# Altium PCB ARM_PCB.PcbDoc
Units mm, origin at the board's own origin, x right, y up, seen from the top; angles counter-clockwise.
Board outline 82.85 x 47.25 mm, 2 copper layers (Top Layer, Bottom Layer); 52 components, 38 nets, 234 pads, 30 vias.
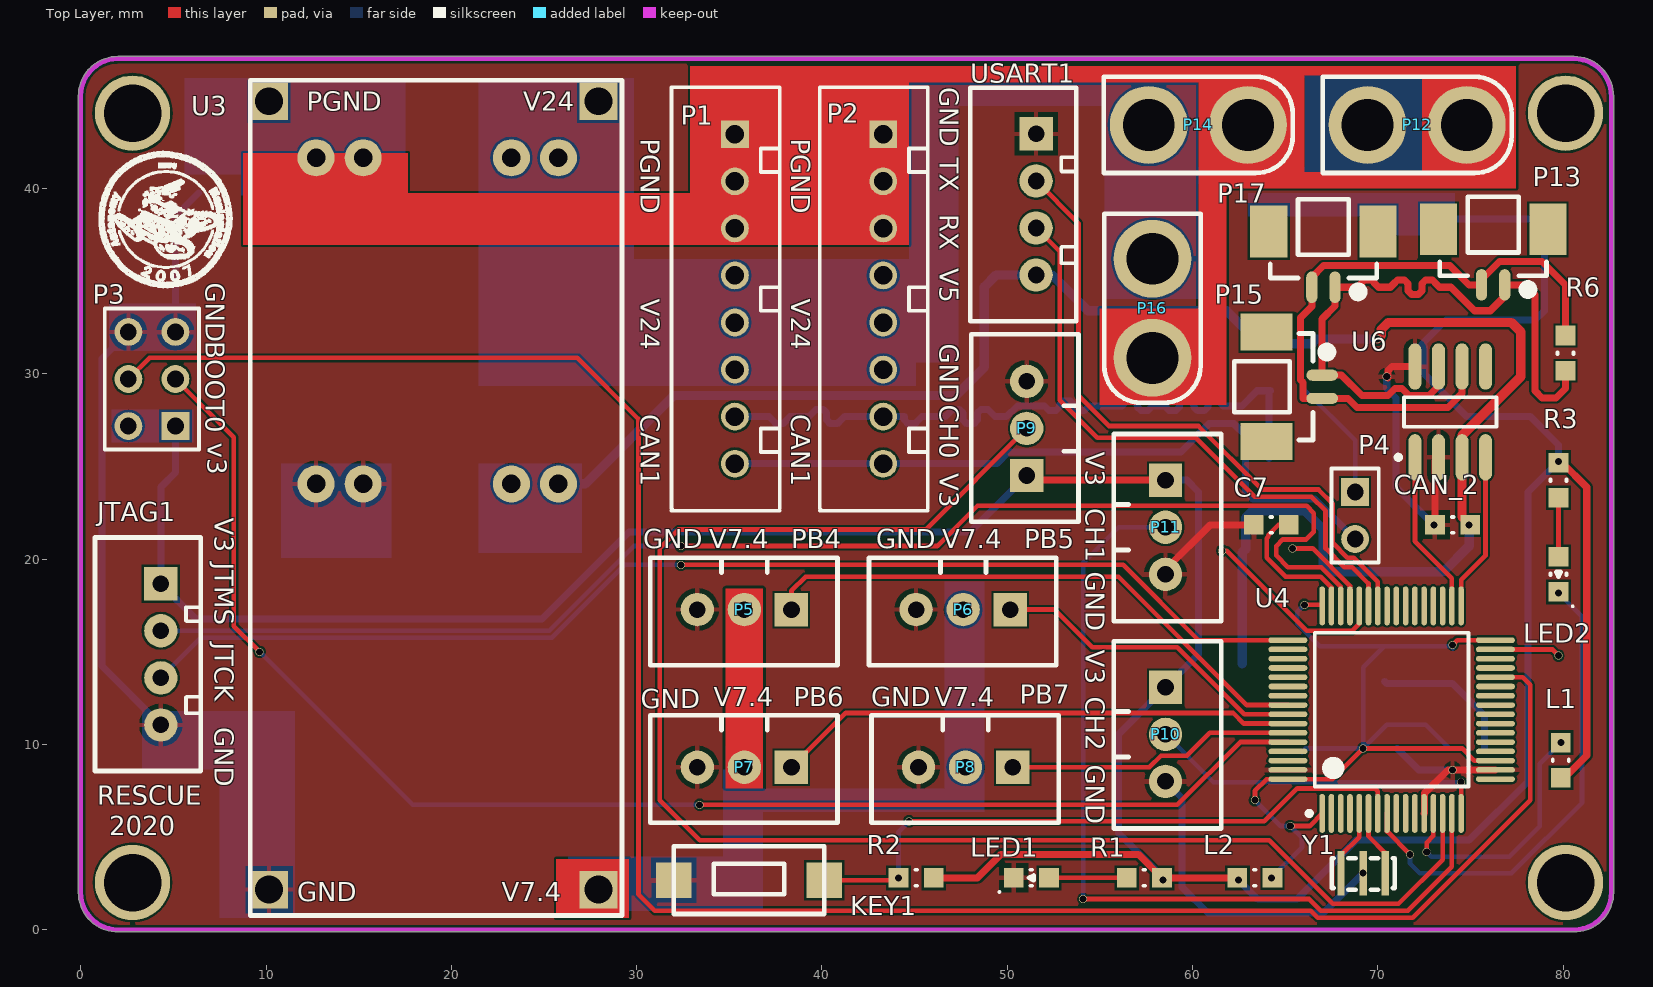
[diagram p0: Top Layer view]
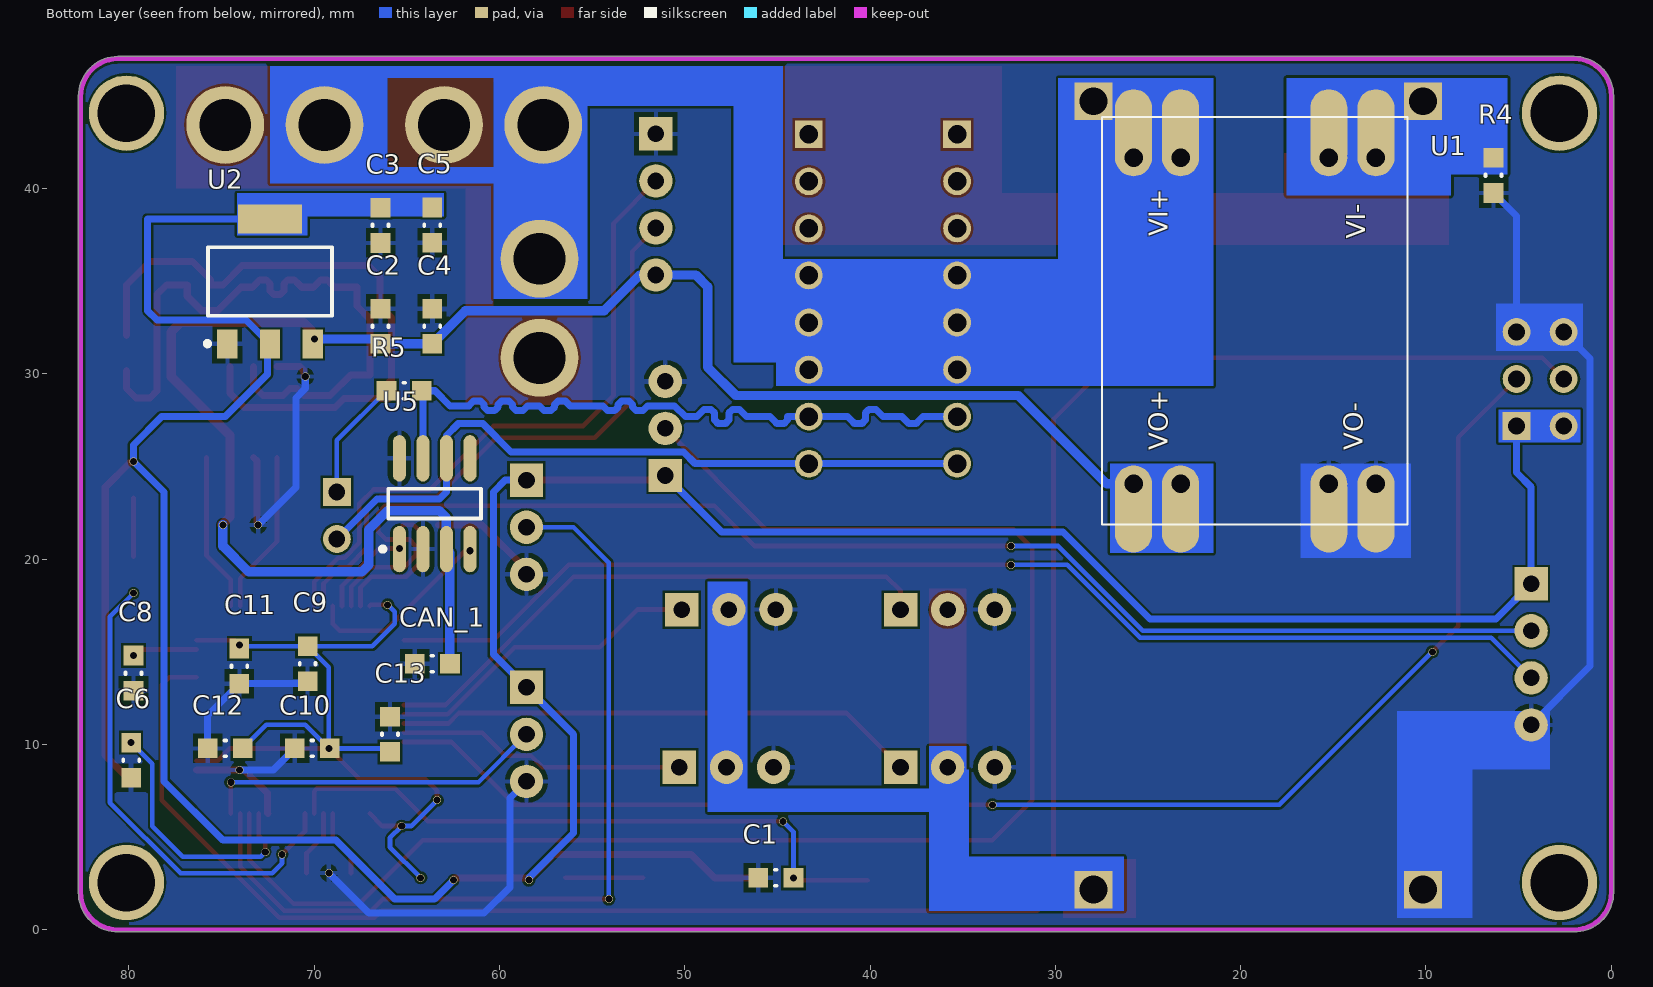
[diagram p1: Bottom Layer view, seen from below]
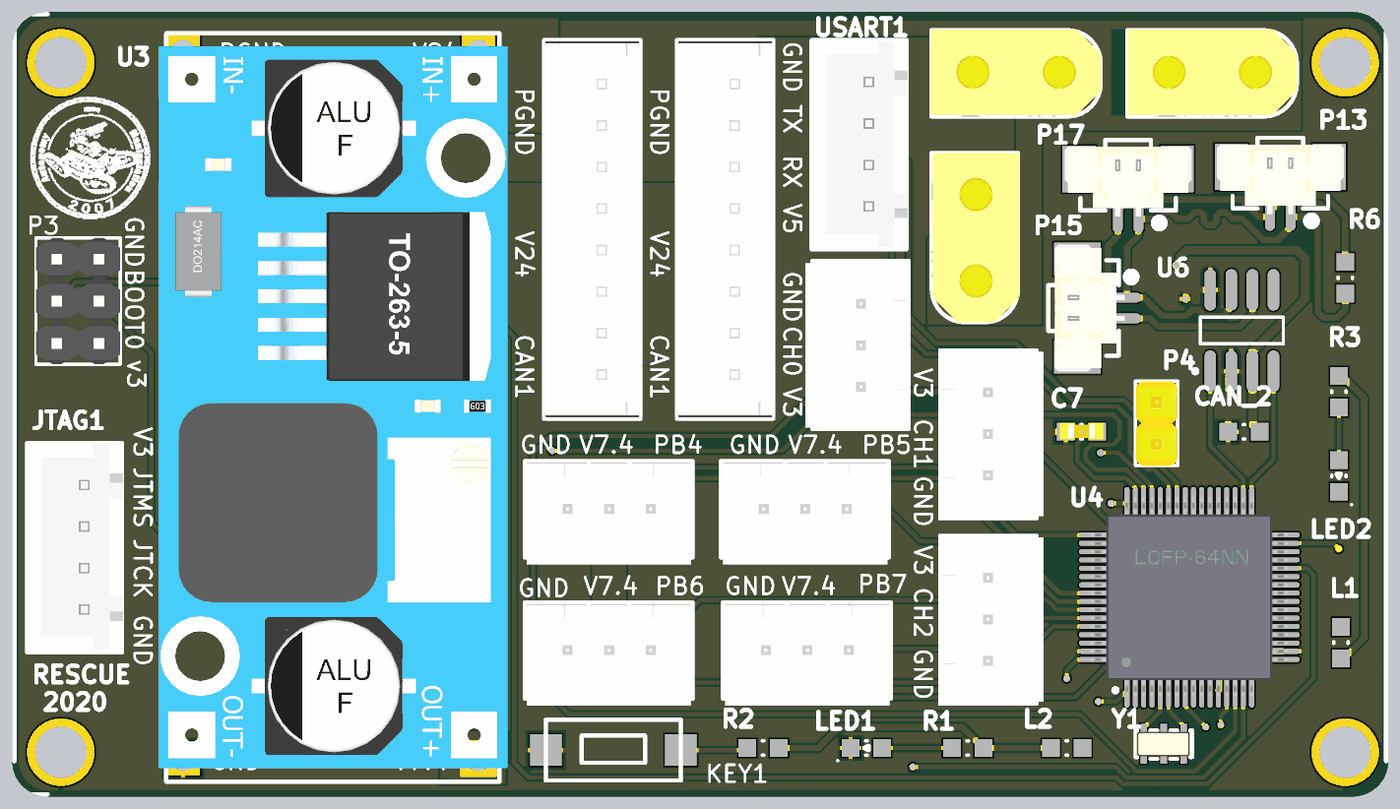
[diagram p2: 3D render of the assembled board from above, using the file's embedded part models]

## Layer stack, top to bottom
Top Solder: solder mask 0.0102, Solder Resist, Dk 3.5
Top Layer: signal copper 0.0356
Dielectric 1: dielectric 0.32, FR-4, Dk 4.8
Bottom Layer: signal copper 0.0356
Bottom Solder: solder mask 0.0102, Solder Resist, Dk 3.5

## Board outline
2,-0.127 cw(c2,2) -0.127,2 -0.127,45 cw(c2,45) 2,47.127 80.6,47.127 cw(c80.6,47) 80.601,47.127 cw(c80.579,44.979) 82.727,44.979 cw(c80.579,44.979) 82.727,44.957 82.727,2 cw(c80.6,2) 80.6,-0.127

## Design rules (kind name [scope] priority, off if disabled: settings)
Clearance [All] p1: gap=0.127 ignorepadtopadclearanceinfootprint=TRUE
ComponentClearance [All] p1 off: gap=0.254 collisioncheckmode=3 verticalgap=0.254 showdistances=FALSE
DiffPairsRouting [All] p1: maxlimit=0.254 minlimit=0.254 mostfreqgap=0.254 toplayer_minwidth=0.381 toplayer_maxwidth=0.381 toplayer_prefwidth=0.381 bottomlayer_minwidth=0.381 bottomlayer_maxwidth=0.381 bottomlayer_prefwidth=0.381 maxuncoupledlength=12.7
Height [All] p1 off: minheight=0 maxheight=25.4 prefheight=12.7
HoleSize [All] p1 off: absolutevalues=TRUE maxlimit=2.54 minlimit=0.025 maxpercent=80.000 minpercent=20.000
MinimumSolderMaskSliver [All] p1 off: minsoldermaskwidth=0.254
PolygonConnect [All] p1: connectstyle=Relief reliefconductorwidth=0.254 reliefentries=4 polygonreliefangle="90 Angle" airgapwidth=0.254
RoutingVias [All] p1: holewidth=0.711 width=1.27 viastyle="Through Hole" minholewidth=0.711 minwidth=1.27 maxholewidth=0.711 maxwidth=1.27
SilkToSilkClearance [All] p1 off: silktosilkclearance=0.254
SilkToSolderMaskClearance [IsPad] p1 off: minsilkscreentomaskgap=0.254 clearancetoexposedcopper=TRUE
SolderMaskExpansion [All] p1: expansion=0.102
Width VCC_5 [InNet('VCC_5')] p1: maxlimit=0.762 minlimit=0.381 preferedwidth=0.762
Width PGND [InNet('PGND')] p2: maxlimit=1.27 minlimit=0.762 preferedwidth=1.27
Width GND [InNet('GND')] p3: maxlimit=0.762 minlimit=0.254 preferedwidth=0.762
Width VCC_24 [InNet('VCC_24')] p4: maxlimit=1.27 minlimit=0.889 preferedwidth=1.27
Width VCC_7.4 [InNet('VCC_7.4')] p5: maxlimit=0.762 minlimit=0.508 preferedwidth=0.762
Width VCC_3.3 [InNet('VCC_3.3')] p6: maxlimit=0.381 minlimit=0.381 preferedwidth=0.381
Width [All] p7: maxlimit=0.254 minlimit=0.254 preferedwidth=0.254
23 further rules are at their usual default settings.

## Classes and differential pairs
differential pair CAN2: +CAN2_P -CAN2_N
differential pair CAN1: +CAN1_P -CAN1_N

## Components (designator, comment, footprint, x,y, rotation, side; value= is the part's Value field where it differs from the comment)
C1 "104" C0603 45.085,2.794 r0 bottom
C2 "104" C0603 66.421,32.564 r90 bottom
C3 "104" C0603 66.421,38.011 r270 bottom
C4 "104" C0603 63.627,32.564 r270 bottom
C5 "104" C0603 63.627,38.025 r90 bottom
C6 "104" C0603/1608 79.883,9.144 r270 bottom
C7 "225" C0603/1608 64.255,21.844 r0 top
C8 "225" C0603/1608 79.756,13.843 r90 bottom
C9 "104" C0603/1608 70.358,14.351 r90 bottom
C10 "104" C0603/1608 70.104,9.779 r180 bottom
C11 "104" C0603/1608 74.041,14.224 r90 bottom
C12 "104" C0603/1608 74.803,9.779 r180 bottom
C13 "104" C0603/1608 65.913,10.541 r270 bottom
CAN_1 "104" C0603 63.627,14.351 r180 bottom
CAN_2 "104" C0603 74.041,21.844 r0 top
JTAG1 "Header 4" Header1*4_XH2.54_zhi 3.302,5.715 r90 top
KEY1 "KEY2" KEY_RESET 35.941,2.794 r0 top
L1 "UPZ1608E101" L0603/1608 79.883,9.144 r90 top
L2 "UPZ1608E101" L0603/1608 63.373,2.794 r0 top
LED1 "LED BLUE" LED0603 51.308,2.794 r180 top
LED2 "LED RED" LED0603 79.756,19.177 r270 top
P1 "Header 8" Header1*8_XH2.54_zhi 38.1,39.624 r0 top
P2 "Header 8" Header1*8_XH2.54_zhi 46.101,39.624 r0 top
P3 "Header 3X2" BOOT 8.917,24.511 r180 top
P4 "Header 2" TM 68.906,22.86 r0 top
P5 "Header 3H" Header1*3XH2.54 35.306,13.208 r180 top
P6 "Header 3H" Header1*3XH2.54 47.117,13.208 r180 top
P7 "Header 3H" Header1*3XH2.54 35.306,4.699 r180 top
P8 "Header 3H" Header1*3XH2.54 47.244,4.699 r180 top
P9 "Header 3H" Header1*3XH2.54 46.99,27.559 r90 top
P10 "Header 3H" Header1*3XH2.54 62.611,10.033 r270 top
P11 "Header 3H" Header1*3XH2.54 62.611,21.209 r270 top
P12 "Header 2" XT30_ĸ 73.898,51.435 r0 top
P13 "CAN-GH1.25-2P" GH1.25-2P（立式） 76.854,34.798 r0 top
P14 "Header 2" XT30_ĸ 62.087,51.435 r0 top
P15 "CAN-GH1.25-2P" GH1.25-2P（立式） 67.002,29.923 r90 top
P16 "Header 2" XT30_ĸ 65.84,31.766 r270 top
P17 "CAN-GH1.25-2P" GH1.25-2P（立式） 67.691,34.671 r0 top
R1 "4.7K" R0603 57.404,2.794 r180 top
R2 "10kΩ" R0603 45.085,2.794 r0 top
R3 "4K7" R0603 79.756,24.257 r90 top
R4 "0R" R0603 6.35,40.706 r270 bottom
R5 "R_120" R0603 65.151,29.083 r0 bottom
R6 "R_120" R0603 80.137,31.115 r90 top
U1 "降压DM02" 降压DM02 17.081,47.08 r270 bottom
U2 "1117_WYN" SOT-223 72.39,34.977 r180 bottom
U3 "LM2596" LM2596_big 19.86,24.725 r180 top
U4 "STM32F405RGT6" LQFP64 70.751,11.871 r90 top
U5 "TJA1050" SO8_M 63.5,22.987 r90 bottom
U6 "TJA1050" SO8_M 73.914,27.94 r90 top
USART1 "Header 4" Header1*4_XH2.54_zhi 50.546,29.995 r90 top
Y1 "Crystal_Cap" XTAL-3213 69.215,3.048 r0 top

## Footprints (in the part's own frame and the unit in brackets; to place one, negate y for a bottom-side part, rotate by r counter-clockwise, add the part's x,y. Pads: shape width x height; smd on the part's side, far side on the other; paste and mask are expansions set on the pad)
BOOT [mm]
  rect 1.5x1.5 hole 0.9: 1(3.81,-2.667)
  round 1.5 hole 0.9: 2(6.35,-2.667) 3(3.81,-5.207) 4(6.35,-5.207) 5(3.81,-7.747) 6(6.35,-7.747)
  silkscreen extent 2.54,-9.02 7.62,-1.4, body extent 2.54,-9.02 7.62,-1.4, height 8.38
C0603 [mm]
  rect 1.06x1.06 smd: 1(-0.95,0) 2(0.95,0)
  silkscreen extent -0.05,-0.43 0.05,0.43, body extent -0.85,-0.48 0.85,0.47, height 0.95
C0603/1608 [mm]
  rect 1.06x1.06 smd: 1(-0.95,0) 2(0.95,0)
  silkscreen extent -0.05,-0.43 0.05,0.43, body extent -1.29,-0.48 1.31,0.53, height 0.95
GH1.25-2P（立式） [mm]
  rect 2x2.8 smd: 0(-3.575,3) 0(2.325,3)
  oval 0.6x1.7 smd: 1(0,0) 2(-1.25,0)
  silkscreen extent -3.5,-0.5 2.25,4.75, body extent -4.45,0.15 3.2,4.35, height 4.7
Header1*3XH2.54 [mm]
  rect 1.8x1.8 hole 0.9: 1(-3.048,-4.064)
  round 1.8 hole 0.9: 2(-0.508,-4.064) 3(2.032,-4.064)
  silkscreen extent -5.54,-6.86 4.57,-1.06, body extent -5.46,-6.73 4.44,-0.64, height 7
Header1*4_XH2.54_zhi [mm]
  rect 1.8x1.8 hole 0.9: 1(12.954,-1.016)
  round 1.8 hole 0.9: 2(10.414,-1.016) 3(7.874,-1.016) 4(5.334,-1.016)
  silkscreen extent 2.84,-3.17 15.44,2.54, body extent 2.97,-3.26 15.37,2.49, height 7
Header1*8_XH2.54_zhi [mm]
  rect 1.5x1.5 hole 1: 1(-2.794,3.302)
  round 1.5 hole 1: 2(-2.794,0.762) 3(-2.794,-1.778) 4(-2.794,-4.318) 5(-2.794,-6.858) 6(-2.794,-9.398) 7(-2.794,-11.938) 8(-2.794,-14.478)
  silkscreen extent -6.22,-17.02 -0.38,5.84, body extent -6.13,-16.79 -0.38,5.61, height 7
KEY_RESET [mil]
  rect 75x75 smd: 1(-155,-5) 2(165,-5)
  silkscreen extent -155,-77 165,67, body extent -175,-75 185,65, height 98
L0603/1608 [mm]
  rect 1.06x1.06 smd: 1(-0.95,0) 2(0.95,0)
  silkscreen extent -0.05,-0.43 0.05,0.43, body extent -0.9,-0.5 0.9,0.5, height 1
LED0603 [mm]
  rect 1.06x1.06 smd: 1(-0.95,0) 2(0.95,0)
  silkscreen extent -0.13,-0.43 1.78,0.81, body extent -0.85,-0.48 0.85,0.47, height 0.95
LM2596_big [mm]
  rect 2.032x2.032 hole 1.5: 1(-8.08,-19.979) 2(9.7,-19.979) 3(-8.08,22.566) 4(9.7,22.566)
  silkscreen extent -9.35,-21.12 10.72,23.96, body extent -9.82,-20.35 11.18,23.15, height 13.21
LQFP64 [mm]
  oval 2.1x0.3 smd: 1(-5.6,3.75) 2(-5.6,3.25) 3(-5.6,2.75) 4(-5.6,2.25) 5(-5.6,1.75) 6(-5.6,1.25) 7(-5.6,0.75) 8(-5.6,0.25) 9(-5.6,-0.25) 10(-5.6,-0.75) 11(-5.6,-1.25) 12(-5.6,-1.75) 13(-5.6,-2.25) 14(-5.6,-2.75) 15(-5.6,-3.25) 16(-5.6,-3.75) 33(5.6,-3.75) 34(5.6,-3.25) 35(5.6,-2.75) 36(5.6,-2.25) 37(5.6,-1.75) 38(5.6,-1.25) 39(5.6,-0.75) 40(5.6,-0.25) 41(5.6,0.25) 42(5.6,0.75) 43(5.6,1.25) 44(5.6,1.75) 45(5.6,2.25) 46(5.6,2.75) 47(5.6,3.25) 48(5.6,3.75)
  oval 0.3x2.1 smd: 17(-3.75,-5.6) 18(-3.25,-5.6) 19(-2.75,-5.6) 20(-2.25,-5.6) 21(-1.75,-5.6) 22(-1.25,-5.6) 23(-0.75,-5.6) 24(-0.25,-5.6) 25(0.25,-5.6) 26(0.75,-5.6) 27(1.25,-5.6) 28(1.75,-5.6) 29(2.25,-5.6) 30(2.75,-5.6) 31(3.25,-5.6) 32(3.75,-5.6) 49(3.75,5.6) 50(3.25,5.6) 51(2.75,5.6) 52(2.25,5.6) 53(1.75,5.6) 54(1.25,5.6) 55(0.75,5.6) 56(0.25,5.6) 57(-0.25,5.6) 58(-0.75,5.6) 59(-1.25,5.6) 60(-1.75,5.6) 61(-2.25,5.6) 62(-2.75,5.6) 63(-3.25,5.6) 64(-3.75,5.6)
  silkscreen extent -5.72,-4.15 4.15,4.57, body extent -6,-6 6,6, height 1.6
R0603 [mm]
  rect 1.06x1.06 smd: 1(-0.95,0) 2(0.95,0)
  silkscreen extent -0.05,-0.43 0.05,0.43, body extent -0.85,-0.48 0.85,0.47, height 0.95
SO8_M [mm]
  oval 2.5x0.7 smd: 1(-2.45,1.905) 2(-2.45,0.635) 3(-2.45,-0.635) 4(-2.45,-1.905) 5(2.45,-1.905) 6(2.45,-0.635) 7(2.45,0.635) 8(2.45,1.905)
  silkscreen extent -2.57,-2.5 0.8,2.93, body extent -2,-2.5 2,2.5, height 1.75
SOT-223 [mm]
  rect 1.1x1.55 smd: 1(-2.3,-3.375) 2(0,-3.375) 3(2.3,-3.375)
  rect 3.45x1.55 smd: 4(0,3.375)
  silkscreen extent -3.5,-3.48 3.35,1.85, body extent -3.3,-3.94 3.3,3.43, height 0.8
TM [mm]
  rect 1.5x1.5 hole 0.9: 1(-0.127,0.762)
  round 1.5 hole 0.9: 2(-0.127,-1.778)
  silkscreen extent -1.4,-3.05 1.14,2.03, body extent -1.4,-3.05 1.14,2.03, height 9.5
XT30_ĸ [mm]
  round 4.2 hole 2.8: 1(-4.445,-8.001) 2(0.905,-8.001)
  silkscreen extent -6.87,-10.6 3.33,-5.4, body extent -6.96,-10.63 3.44,-5.33, height 12.6
XTAL-3213 [mm]
  rect 0.4x2.4 smd: 1(-1.2,0) 2(0,0) 3(1.2,0)
  silkscreen extent -1.7,-0.9 1.7,0.8, body extent -1.63,-0.76 1.57,0.74, height 0.8
降压DM02 [mm]
  oval 4.5x2 smd: 1(3.974,-8.699) 1(3.974,-6.159) 2(3.974,1.841) 2(3.974,4.381) 3(24.474,-8.699) 3(24.474,-6.159) 4(24.474,1.841) 4(24.474,4.381)
  round 2 hole 1: 1(5.424,-8.699) 1(5.424,-6.159) 2(5.424,1.841) 2(5.424,4.381) 3(23.024,-8.699) 3(23.024,-6.159) 4(23.024,1.841) 4(23.024,4.381)
  silkscreen extent 3.22,-10.41 25.22,6.09, body extent 3.3,-10.29 25.15,6.1, height 4.5

## Part data
C1 C2 C3 CAN_1 CAN_2: library part CAP_WYN
C4 C5: library part Cap
C6 C7 C8 C9 C10 C11 C12 C13: library part 陶瓷电容, "陶瓷电容"
JTAG1 USART1: "Header, 4-Pin", LatestRevisionDate=17-Jul-2002, LatestRevisionNote="Re-released for DXP Platform.", Publisher="Altium Limited"
KEY1: library part KEY
L1 L2: library part 磁珠, "贴片磁珠"
LED1: library part LED, Color=BLUE
LED2: library part LED, Color=RED
P1 P2: "Header, 8-Pin", LatestRevisionDate=17-Jul-2002, LatestRevisionNote="Re-released for DXP Platform.", Publisher="Altium Limited"
P3: "Header, 3-Pin, Dual row", LatestRevisionDate=17-Jul-2002, LatestRevisionNote="Re-released for DXP Platform.", Publisher="Altium Limited"
P13 P15 P17: "CAN-GH1.25-2P端子座"
R1 R5 R6: library part R
R2: library part RES_WYN
R3 R4: library part Resistor
U3: library part DC-DC稳压模块, "云辉 LM2596S DC-DC降压电源模块"
U4: "微控制器STM32F405RGT6"
Y1: LatestRevisionDate=17-Jul-2002, LatestRevisionNote="Re-released for DXP Platform.", Published=8-Jun-2000, Publisher="Altium Limited"

## Free pads (board coordinates)
  round 4.064 hole 3.1: 1(2.794,44.069) 2(2.794,2.54) 3(80.137,2.54) 4(80.137,44.069)

## Via types
v1: diameter 0.432, hole 0.381, Top Layer to Bottom Layer, 30 vias

## Nets (pads, with @x,y where several pads share a name; then routed paths per layer and width w, separated by ;. In a path a pad name is that pad's centre, name@x,y a point inside that pad or via, vN(x,y) a via of type N, cw(c..) or ccw(c..) an arc to the next point about the centre after c; other vN are vias at no path point)
ADC_CH0: P9.2 U4.14 | length 84.1
  Top Layer w0.254: P9.2 45.593,21.59 32.258,21.59 31.242,20.574 31.242,6.985 33.401,4.826 64.135,4.826 67.564,1.397 71.12,1.397 73.501,3.778 U4.14
ADC_CH1: P11.2 U4.15 | length 47.4
  Top Layer w0.254: v1(54.102,1.651) 66.294,1.651 66.929,1.016 71.628,1.016 74.001,3.389 U4.15
  Bottom Layer w0.254: v1(54.102,1.651) 54.102,19.812 56.007,21.717 P11.2
ADC_CH2: P10.2 U4.16 | length 18.7
  Top Layer w0.254: U4.16 v1(74.501,7.953)
  Bottom Layer w0.254: P10.2 61.135,7.953 v1(74.501,7.953)
BOOT0: P3.3 U4.60 | length 76.9
  Top Layer w0.254: P3.3 8.255,26.57 8.255,16.383 v1(9.652,14.986) ; v1(33.401,6.731) 59.182,6.731 62.572,10.121 U4.60
  Bottom Layer w0.254: v1(9.652,14.986) 17.907,6.731 v1(33.401,6.731)
BOOT1: P3.4 U4.28 | length 114.6
  Top Layer w0.254: P3.4 3.71,30.861 26.797,30.861 30.099,27.559 30.099,1.905 30.988,1.016 66.39,1.016 66.771,0.635 71.882,0.635 78.232,6.985 78.232,13.208 77.819,13.621 U4.28
CAN1_N: P1.8 P2.8 P4.2 U5.6 | length 38.7
  Bottom Layer w0.381: P1.8 P2.8 49.44,25.146 50.075,25.781 59.377,25.781 60.901,27.305 62.23,27.305 62.865,26.67 U5.6 62.865,23.622 63.246,23.241 66.62,23.241 P4.2
CAN1_P: P1.7 P2.7 R5.1 U5.7 | length 38.5
  Bottom Layer w0.381: P1.7 35.941,27.686 37.148,27.686 37.338,27.495 37.529,27.305 37.91,27.305 38.1,27.495 38.291,27.686 38.481,27.686 39.306,27.686 39.497,27.877 39.688,28.067 40.069,28.067 40.259,27.877 40.259,27.686 40.259,27.495 40.45,27.305 40.831,27.305 41.021,27.495 41.212,27.686 41.402,27.686 P2.7 44.45,27.686 44.45,27.495 44.64,27.305 45.021,27.305 45.212,27.495 45.402,27.686 45.593,27.686 46.482,27.686 46.672,27.686 46.863,27.877 47.053,28.067 47.434,28.067 47.625,27.877 47.625,27.686 47.625,27.495 47.816,27.305 48.197,27.305 48.387,27.495 48.387,27.686 48.387,27.877 48.578,28.067 48.959,28.067 49.149,27.877 49.34,27.686 49.53,27.686 49.967,27.686 50.55,28.269 51.689,28.269 52.006,28.269 52.07,28.205 52.261,28.015 52.642,28.015 52.832,28.205 52.832,28.269 52.832,28.332 53.023,28.523 53.404,28.523 53.594,28.332 53.594,28.269 53.594,28.205 53.785,28.015 54.165,28.015 54.356,28.205 54.419,28.269 54.737,28.269 55.88,28.269 56.197,28.269 56.261,28.332 56.451,28.523 56.832,28.523 57.023,28.332 57.023,28.269 57.023,28.205 57.213,28.015 57.594,28.015 57.785,28.205 57.848,28.269 58.483,28.269 58.547,28.205 58.737,28.015 59.118,28.015 59.309,28.205 59.309,28.269 59.309,28.332 59.499,28.523 59.88,28.523 60.071,28.332 60.071,28.269 60.071,28.205 60.261,28.015 60.642,28.015 60.833,28.205 60.833,28.269 60.833,28.332 61.023,28.523 61.404,28.523 61.595,28.332 61.658,28.269 61.722,28.269 62.666,28.269 63.481,29.083 R5.1 64.135,29.017 U5.7
CAN1_RX: U4.44 U5.4 | length 10.3
  Top Layer w0.254: v1(61.595,20.447) 61.849,20.447 66.167,16.129 68.63,16.129 69.001,16.5 U4.44
CAN1_TX: U4.45 U5.1 | length 5
  Top Layer w0.254: v1(65.405,20.574) 66.483,20.574 68.501,18.556 U4.45
CAN2_N: P13.2 P15.2 P17.2 R6.2 U6.6 | length 35.7
  Top Layer w0.381: U6.6 74.549,28.95 73.787,28.188 68.88,28.188 68.395,28.673 P15.2 65.962,28.673 65.962,29.54 65.835,29.667 65.835,33.024 66.441,33.631 P17.2 66.441,35.199 67.081,35.839 73.889,35.839 74.93,34.798 P13.2 75.604,35.091 76.581,36.068 78.867,36.068 80.137,34.798 R6.2
CAN2_P: P13.1 P15.1 P17.1 R6.1 U6.7 | length 35.7
  Top Layer w0.381: U6.7 73.279,29.337 72.765,28.823 72.39,28.823 72.263,28.823 71.691,28.823 71.501,29.013 71.31,29.204 70.929,29.204 70.739,29.013 70.549,28.823 70.358,28.823 69.143,28.823 68.043,29.923 P15.1 67.002,32.966 67.691,33.655 P17.1 68.707,34.671 68.897,34.671 69.088,34.861 69.278,35.052 69.659,35.052 69.85,34.861 70.04,34.671 70.485,34.671 70.675,34.671 70.866,34.861 71.056,35.052 71.438,35.052 71.628,34.861 71.628,34.671 71.628,34.48 71.819,34.29 72.2,34.29 72.39,34.48 72.39,34.671 72.39,34.861 72.581,35.052 72.962,35.052 73.152,34.861 73.343,34.671 73.914,34.671 73.946,34.671 75.216,33.401 76.073,33.401 76.854,34.182 P13.1 77.978,34.798 78.486,34.29 78.486,29.083 78.867,28.702 79.629,28.702 80.137,29.21 R6.1
CAN2_RX: U4.33 U6.4 | length 8.6
  Top Layer w0.254: U4.33 74.501,18.875 75.819,20.193 U6.4
CAN2_TX: U4.34 U6.1 | length 8.8
  Top Layer w0.254: U6.1 72.009,20.955 74.001,18.963 U4.34
GND: C1.2 C2.2 C3.2 C4.1 C5.1 C6.2 C7.1 C8.1 C9.1 C10.1 C11.1 C12.1 C13.1 CAN_1.1 CAN_2.1 JTAG1.4 KEY1.1 LED1.2 P3.5 P3.6 P5.3 P6.3 P7.3 P8.3 P9.3 P10.3 P11.3 R4.2 U1.4 U2.1 U3.4 U4.12 U4.18 U4.63 U5.2 U5.8 U6.2 U6.8 USART1.1 Y1.2 | length 86
  Top Layer w0.381: P11.3 58.547,19.431 60.96,21.844 C7.1 ; v1@70.549,29.781 70.549,30.162 70.776,30.39 U6.8 ; U4.12 72.533,6.304 72.533,7.365 73.79,8.621 v1(74.041,8.621) U4.18 ; CAN_2.1 73.091,25.302 U6.2
  Bottom Layer w0.381: P3.6 1.143,30.834 1.143,14.224 JTAG1.4 ; P3.5 5.107,38.513 R4.2 ; P10.3 59.436,7.112 59.436,2.286 60.833,0.889 67.056,0.889 v1(69.215,3.048) ; C9.1 70.485,13.274 C11.1 75.753,11.562 C12.1 ; v1(70.485,29.845) 70.485,29.21 70.993,28.702 70.993,23.876 v1(73.025,21.844) ; C10.1 72.212,8.621 v1(74.041,8.621)
JTCK: JTAG1.3 U4.49 | length 65
  Top Layer w0.254: v1(32.385,19.685) 56.261,19.685 60.325,15.621 U4.49
  Bottom Layer w0.254: JTAG1.3 6.477,15.748 25.431,15.748 29.368,19.685 v1(32.385,19.685)
JTMS: JTAG1.2 U4.46 | length 74.3
  Top Layer w0.254: v1(32.385,20.701) 46.228,20.701 48.398,22.871 66.156,22.871 66.548,22.479 66.548,21.463 66.145,21.06 64.875,21.06 64.516,20.701 64.516,20.193 65.151,19.558 66.96,19.558 68.001,18.517 U4.46
  Bottom Layer w0.254: JTAG1.2 25.273,16.129 29.845,20.701 v1(32.385,20.701)
NetC6_1: C6.1 L1.2 U4.13 | length 14.1
  Top Layer w0.254: v1(72.644,4.191) 72.644,4.699 73.001,5.056 U4.13
  Bottom Layer w0.254: v1(72.644,4.191) 72.898,3.937 77.089,3.937 78.74,5.588 78.74,8.951 v1(79.883,10.094)
NetC7_2: C7.2 U4.47 | length 7.8
  Top Layer w0.254: C7.2 64.643,21.844 64.089,21.29 64.089,21.209 64.008,21.128 64.008,20.066 65.024,19.05 66.929,19.05 67.501,18.478 U4.47
NetC8_2: C8.2 U4.31 | length 3.5
  Top Layer w0.254: U4.31 79.428,15.121 v1(79.756,14.793)
NetC9_2: C9.2 C10.2 C11.2 C12.2 C13.2 L2.2 U4.1 U4.19 U4.32 U4.48 U4.64 | length 51.5
  Top Layer w0.254: v1(63.373,6.985) 63.373,7.493 64.001,8.121 U4.64 67.557,8.121 v1(69.215,9.779) 74.549,9.779 75.207,9.121 U4.19 ; v1(65.278,5.588) 66.318,5.588 U4.1 ; v1(66.04,17.526) 66.946,17.526 U4.48 ; v1(74.041,15.367) 74.295,15.621 U4.32
  Bottom Layer w0.254: v1(63.373,6.985) 64.77,5.588 v1(65.278,5.588) 65.913,4.953 65.913,4.445 v1(64.262,2.794) ; C13.2 66.101,9.779 C10.2 v1(69.215,9.779) ; v1(66.04,17.526) 65.659,17.145 65.659,16.51 66.868,15.301 C9.2 ; C12.2 72.583,11.049 70.485,11.049 v1(69.215,9.779) ; C11.2 73.914,15.301 C9.2 ; v1(69.215,9.779) 69.215,14.158 C9.2
NetLED1_1: LED1.1 R1.2 | length 4.2
  Top Layer w0.254: LED1.1 R1.2
NetLED2_1: LED2.1 R3.1 | length 3.2
  Top Layer w0.254: LED2.1 R3.1
NetP4_1: P4.1 R5.2 | length 6.6
  Bottom Layer w0.254: R5.2 68.779,26.405 P4.1
OSC_IN: U4.5 Y1.1 | length 3.6
  Top Layer w0.254: Y1.1 68.015,4.007 69.001,4.993 U4.5
OSC_OUT: U4.6 Y1.3 | length 3.6
  Top Layer w0.254: U4.6 69.501,5.048 70.415,4.134 Y1.3
PB4: P5.1 U4.56 | length 31
  Top Layer w0.254: P5.1 38.354,18.288 39.116,19.05 56.007,19.05 62.936,12.121 U4.56
PB5: P6.1 U4.57 | length 17.3
  Top Layer w0.254: P6.1 52.556,17.272 54.588,15.24 59.182,15.24 62.801,11.621 U4.57
PB6: P7.1 U4.58 | length 28.2
  Top Layer w0.254: P7.1 41.286,11.695 62.188,11.695 62.762,11.121 U4.58
PB7: P8.1 U4.59 | length 15.6
  Top Layer w0.254: P8.1 57.677,8.763 58.301,9.387 59.701,9.387 60.935,10.621 U4.59
PC0: LED2.2 U4.8 | length 26.1
  Top Layer w0.254: U4.8 70.501,5.3 v1(71.737,4.064)
  Bottom Layer w0.254: v1(71.737,4.064) 71.737,3.574 72.263,3.048 77.216,3.048 81.026,6.858 81.026,16.891 v1(79.756,18.161)
PGND: P1.1 P1.2 P1.3 P2.1 P2.2 P2.3 P12.2 P14.2 P16.2 R4.1 U1.2 U3.2
RESET: C1.1 KEY1.2 R2.1 U4.7 | length 34.6
  Top Layer w0.254: KEY1.2 44.008,2.667 v1(44.135,2.794) ; v1(44.704,5.842) 63.881,5.842 65.659,7.62 69.85,7.62 70.001,7.469 U4.7
  Bottom Layer w0.254: v1(44.135,2.794) 44.135,5.273 v1(44.704,5.842)
U1_RX: U4.43 USART1.3 | length 33
  Top Layer w0.254: USART1.3 52.832,36.599 52.832,28.575 54.864,26.543 60.174,26.543 63.349,23.368 66.421,23.368 67.183,22.606 67.183,20.574 68.199,19.558 68.622,19.558 69.501,18.679 U4.43
U1_TX: U4.42 USART1.2 | length 35.4
  Top Layer w0.254: USART1.2 53.848,38.123 53.848,28.829 55.499,27.178 60.325,27.178 63.754,23.749 66.802,23.749 67.564,22.987 67.564,20.877 68.363,20.078 68.695,20.078 70.001,18.772 U4.42
VCC_3.3: C3.1 C5.2 JTAG1.1 L1.1 L2.1 P3.1 P3.2 P9.1 P10.1 P11.1 R1.1 R2.2 R3.2 U2.2 U2.4 | length 196.6
  Top Layer w0.381: R2.2 48.387,2.794 49.657,4.064 57.084,4.064 R1.1 L2.1 ; P9.1 51.308,24.257 P11.1 ; R3.2 79.949,25.207 81.28,23.876 81.28,9.398 80.076,8.194 L1.1
  Bottom Layer w0.381: P3.1 5.107,24.665 4.318,23.876 JTAG1.1 6.223,16.764 24.892,16.764 29.591,21.463 48.006,21.463 P9.1 ; v1(58.42,2.667) 58.42,2.794 56.007,5.207 56.007,10.541 P10.1 60.325,14.859 60.325,23.622 59.69,24.257 P11.1 ; v1(62.484,2.667) 63.5,1.651 65.659,1.651 68.834,4.826 74.93,4.826 78.105,8.001 78.105,23.622 v1(79.756,25.273) 79.756,26.162 78.232,27.686 74.803,27.686 72.517,29.972 72.517,31.475 U2.2 73.681,32.893 78.486,32.893 78.996,33.403 78.996,38.352 U2.4 U2.4@71.781,38.961 ; C5.2 C5.2@63.641,38.961
VCC_5: C2.1 C4.2 CAN_1.2 CAN_2.2 U1.3 U2.3 U5.3 U6.3 USART1.4 | length 97.9
  Top Layer w0.508: v1(69.977,31.877) 70.189,32.089 70.189,32.389 70.566,32.766 77.216,32.766 77.724,32.258 77.724,29.845 74.549,26.67 U6.3 74.549,22.286 CAN_2.2
  Bottom Layer w0.508: U1.3@25.78,24.056 27.231,24.056 32.004,28.829 47.244,28.829 48.768,30.353 48.768,34.694 49.403,35.329 USART1.4 52.428,35.329 54.356,33.401 61.84,33.401 C4.2 C2.1 66.684,31.877 v1(69.977,31.877) ; CAN_1.2 62.677,20.349 U5.3 62.865,22.225 63.246,22.606 66.04,22.606 67.056,21.59 67.056,19.685 67.437,19.304 73.533,19.304 74.93,20.701 v1(74.93,21.844)
VCC_7.4: P5.2 P6.2 P7.2 P8.2 U3.3
VCC_24: P1.4 P1.5 P1.6 P2.4 P2.5 P2.6 P12.1 P14.1 P16.1 U1.1 U3.1
pads on no net: P13.0 P15.0 P17.0 U4.2 U4.3 U4.4 U4.9 U4.10 U4.11 U4.17 U4.20 U4.21 U4.22 U4.23 U4.24 U4.25 U4.26 U4.27 U4.29 U4.30 U4.35 U4.36 U4.37 U4.38 U4.39 U4.40 U4.41 U4.50 U4.51 U4.52 U4.53 U4.54 U4.55 U4.61 U4.62 U5.5 U6.5

## Polygon pours and split planes (outlines as drawn)
GND on Top Layer "Top Layer-No Net" (solid, remove dead copper, pour order 32): -8.763,49.276 -5.969,52.07 87.122,52.07 87.122,0.889 81.788,-4.445 80.137,-2.794 -4.191,-2.794
GND on Bottom Layer "Top Layer-No Net" (solid, remove dead copper, pour order 34): -5.334,-4.699 83.947,-4.699 86.233,-2.413 86.233,55.372 -2.667,55.372 -4.699,53.34

## Keep-outs
Keep-Out Layer:
  lines w0.254: 82.6,44.958 ccw(c80.579,44.979) 80.6,47 2,47 ccw(c2,45) 0,45 0,2 ccw(c2,2) 2,0 80.6,0 ccw(c80.6,2) 82.6,2 82.6,45

## Other copper
Top Layer:
  rectangle net PGND: 8.763,36.957 17.653,41.91
  rectangle net PGND: 8.763,36.957 36.195,39.751
  rectangle net PGND: 32.893,36.957 44.704,45.72
  rectangle net VCC_7.4: 34.798,7.62 36.83,18.415
  rectangle net VCC_7.4: 25.654,0.635 29.591,3.81
  rectangle net PGND: 54.991,28.321 61.849,33.528
  rectangle net PGND: 60.325,32.004 61.849,46.355
  rectangle net PGND: 60.579,40.005 66.04,46.482
  rectangle net PGND: 65.278,40.005 77.47,40.894
  rectangle net PGND: 72.39,40.64 77.47,46.355
  rectangle net PGND: 59.055,46.101 77.47,46.609
  rectangle net PGND: 32.893,45.72 60.452,46.609
  rectangle net PGND: 32.893,44.323 44.704,46.228
Bottom Layer:
  rectangle net PGND: 5.588,40.767 17.272,45.974
  rectangle net VCC_24: 28.575,29.337 45.085,36.195
  rectangle net VCC_24: 44.704,30.607 47.371,44.831
  rectangle net GND: 10.795,20.066 16.764,25.146
  rectangle net VCC_5: 21.463,20.32 27.051,25.146
  rectangle net GND: 3.302,8.636 11.176,11.811
  rectangle net GND: 7.493,0.635 11.557,11.811
  rectangle net VCC_24: 21.463,29.337 22.098,38.735
  rectangle net VCC_24: 21.59,32.766 29.845,40.64
  rectangle net VCC_24: 21.59,29.337 35.433,35.941
  rectangle net VCC_24: 33.274,29.337 44.45,36.068
  rectangle net VCC_7.4: 26.289,1.016 36.83,3.937
  rectangle net VCC_7.4: 34.671,1.651 36.83,8.636
  rectangle net VCC_3.3: 1.651,26.289 6.096,28.067
  rectangle net GND: 1.524,31.242 6.223,33.782
  rectangle net VCC_7.4: 34.798,6.858 36.83,9.906
  rectangle net VCC_7.4: 34.798,6.35 48.006,7.62
  rectangle net VCC_7.4: 46.609,6.35 48.768,18.796
  region net VCC_3.3: 74.168,38.481 70.358,38.481 70.358,37.465 74.168,37.465
  region net VCC_3.3: 74.168,39.751 62.992,39.751 62.992,38.481 74.168,38.481
  region net PGND: 17.526,45.974 8.636,45.974 8.636,39.624 17.526,39.624
  region net VCC_24: 29.845,45.974 21.463,45.974 21.463,38.735 29.845,38.735
  rectangle net VCC_24: 55.245,34.036 60.325,46.482
  rectangle net VCC_24: 66.04,40.386 72.39,46.609
  rectangle net VCC_24: 55.118,45.974 66.675,46.609
  rectangle net VCC_24: 59.055,40.259 72.39,41.148
  rectangle net VCC_24: 44.704,44.45 55.753,46.609

## Silkscreen, mask and mechanical layers (free items; w line width, h text height)
Top Overlay:
  drawing of 2360 lines, arcs and shapes, not listed
  text "GND" at 46.355,45.466 h1.02 r270
  text "PGND" at 12.192,44.196 h1.02
  text "V24" at 23.876,44.196 h1.02
  text "PGND" at 30.226,42.672 h1.02 r270
  text "PGND" at 30.226,42.672 h1.02 r270
  text "PGND" at 38.354,42.672 h1.02 r270
  text "TX" at 46.355,41.656 h1.02 r270
  text "RX" at 46.355,38.608 h1.02 r270
  text "V5" at 46.355,35.687 h1.02 r270
  text "GND" at 6.731,34.925 h1.02 r270
  text "V24" at 30.226,34.036 h1.02 r270
  text "V24" at 38.354,34.036 h1.02 r270
  text "BOOT0" at 6.731,31.75 h1.02 r270
  text "GND" at 46.355,31.623 h1.02 r270
  text "CH0" at 46.355,28.321 h1.02 r270
  text "CAN1" at 30.226,27.813 h1.02 r270
  text "CAN1" at 38.354,27.813 h1.02 r270
  text "v3" at 6.858,26.289 h1.02 r270
  text "V3" at 54.229,25.781 h1.02 r270
  text "V3" at 46.355,24.638 h1.02 r270
  text "CH1" at 54.229,22.733 h1.02 r270
  text "V3" at 7.239,22.225 h1.02 r270
  text "GND" at 30.353,20.574 h1.02
  text "V7.4" at 33.909,20.574 h1.02
  text "PB4" at 38.354,20.574 h1.02
  text "GND" at 42.926,20.574 h1.02
  text "V7.4" at 46.482,20.574 h1.02
  text "PB5" at 50.927,20.574 h1.02
  text "JTMS" at 7.239,19.812 h1.02 r270
  text "GND" at 54.229,19.304 h1.02 r270
  text "JTCK" at 7.239,15.494 h1.02 r270
  text "V3" at 54.229,15.113 h1.02 r270
  text "CH2" at 54.229,12.573 h1.02 r270
  text "PB7" at 50.673,12.192 h1.02
  text "V7.4" at 34.163,12.065 h1.02
  text "PB6" at 38.481,12.065 h1.02
  text "GND" at 42.672,12.065 h1.02
  text "V7.4" at 46.101,12.065 h1.02
  text "GND" at 30.226,11.938 h1.02
  text "GND" at 7.239,10.922 h1.02 r270
  text "GND" at 54.229,8.89 h1.02 r270
  text "RESCUE" at 0.889,6.731 h1.02
  text "2020" at 1.524,5.08 h1.02
  text "GND" at 11.684,1.524 h1.02
  text "V7.4" at 22.733,1.524 h1.02

## Dimensions
2,0 to 2,47 on Top Overlay
0,2 to 82.6,2 on Top Overlay

## Text inside footprints (layer, text, board x,y; h text height)
U1: Bottom Overlay "VO-" at 13.398,25.871 h1.02 r270; Bottom Overlay "VI-" at 13.271,37.301 h1.02 r270; Bottom Overlay "VI+" at 23.939,37.428 h1.02 r270; Bottom Overlay "VO+" at 23.939,25.871 h1.02 r270